# EAGLE board UFBmod_2V1a (EAGLE 7.7.0), part 1 of 2
UFBmod - the best digital modulation ever created :-)
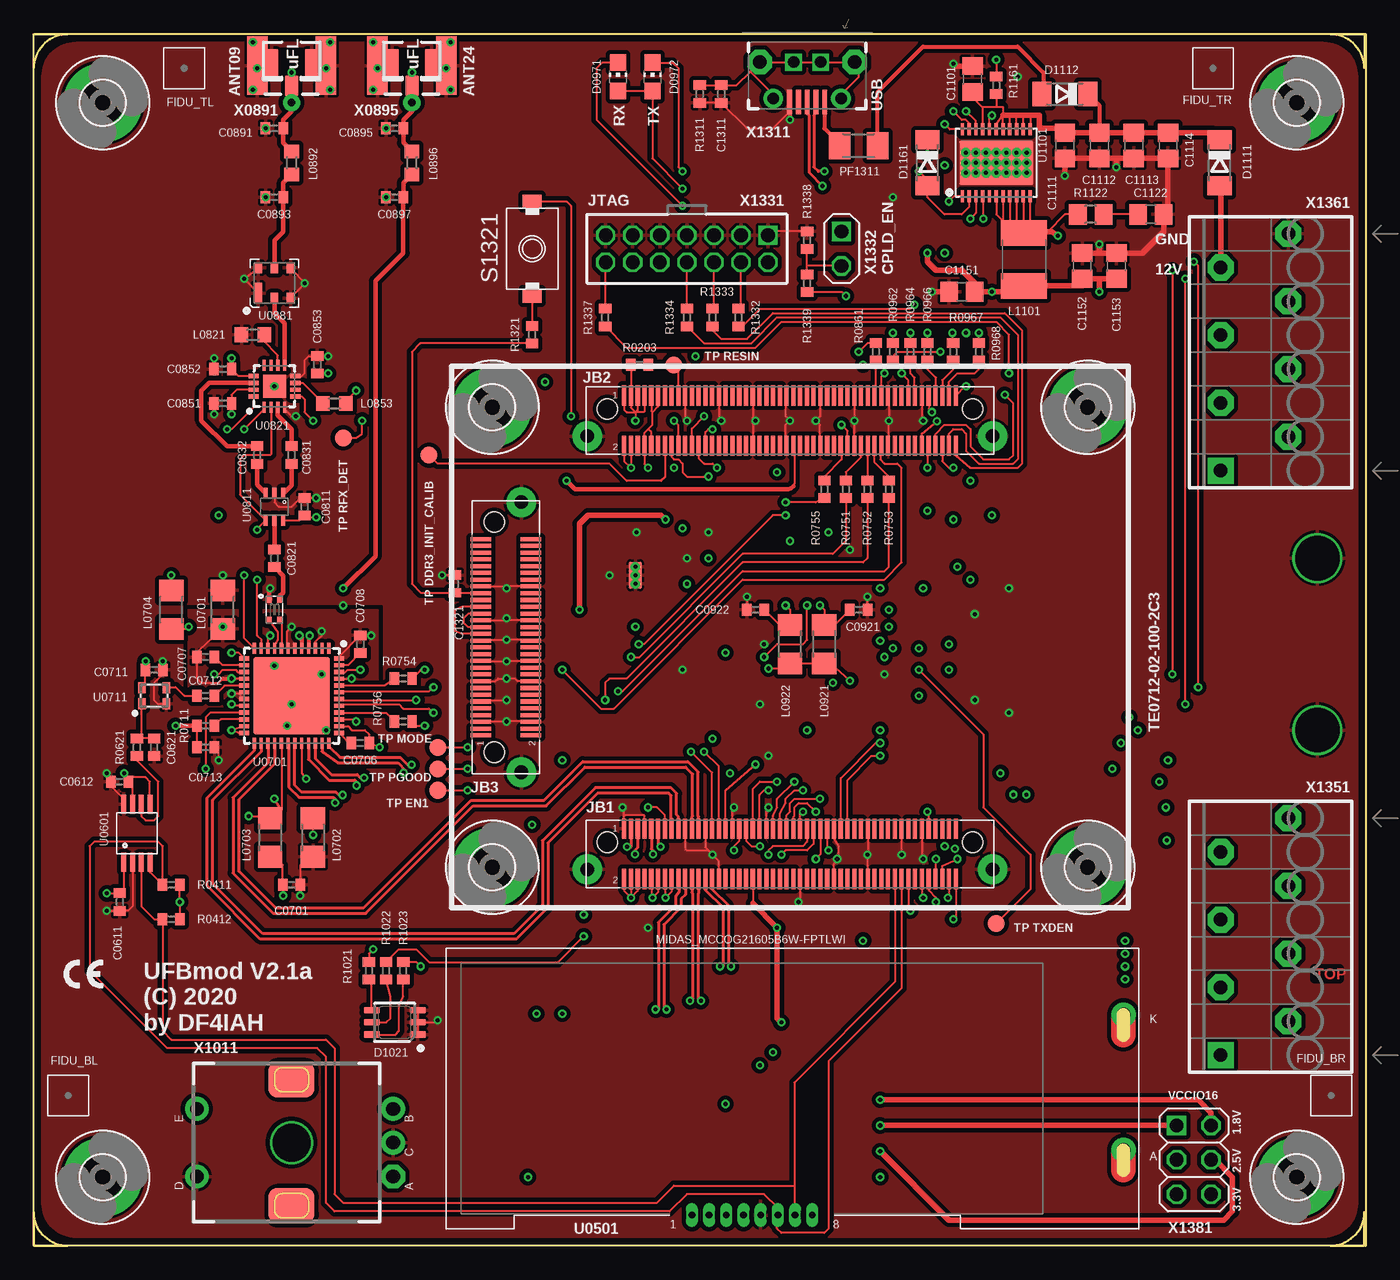
[diagram p0: board, top side]
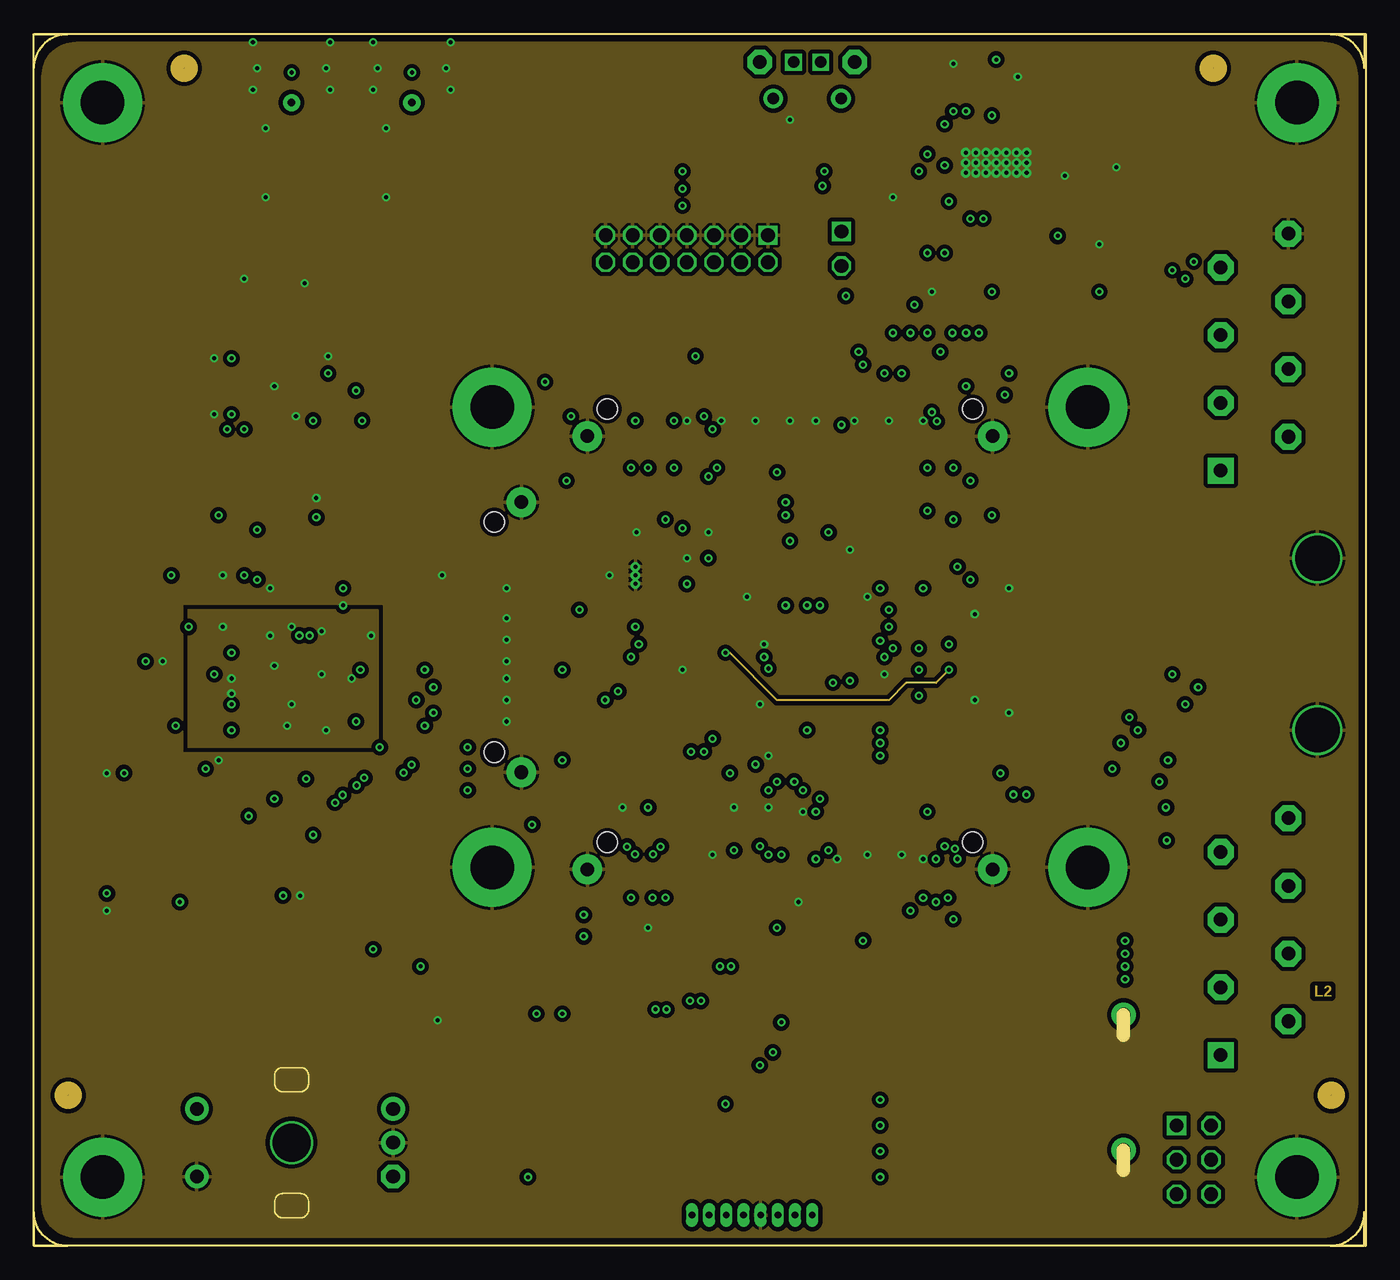
[diagram p1: board, inner layer Route2__GND_Pair_AVSS]
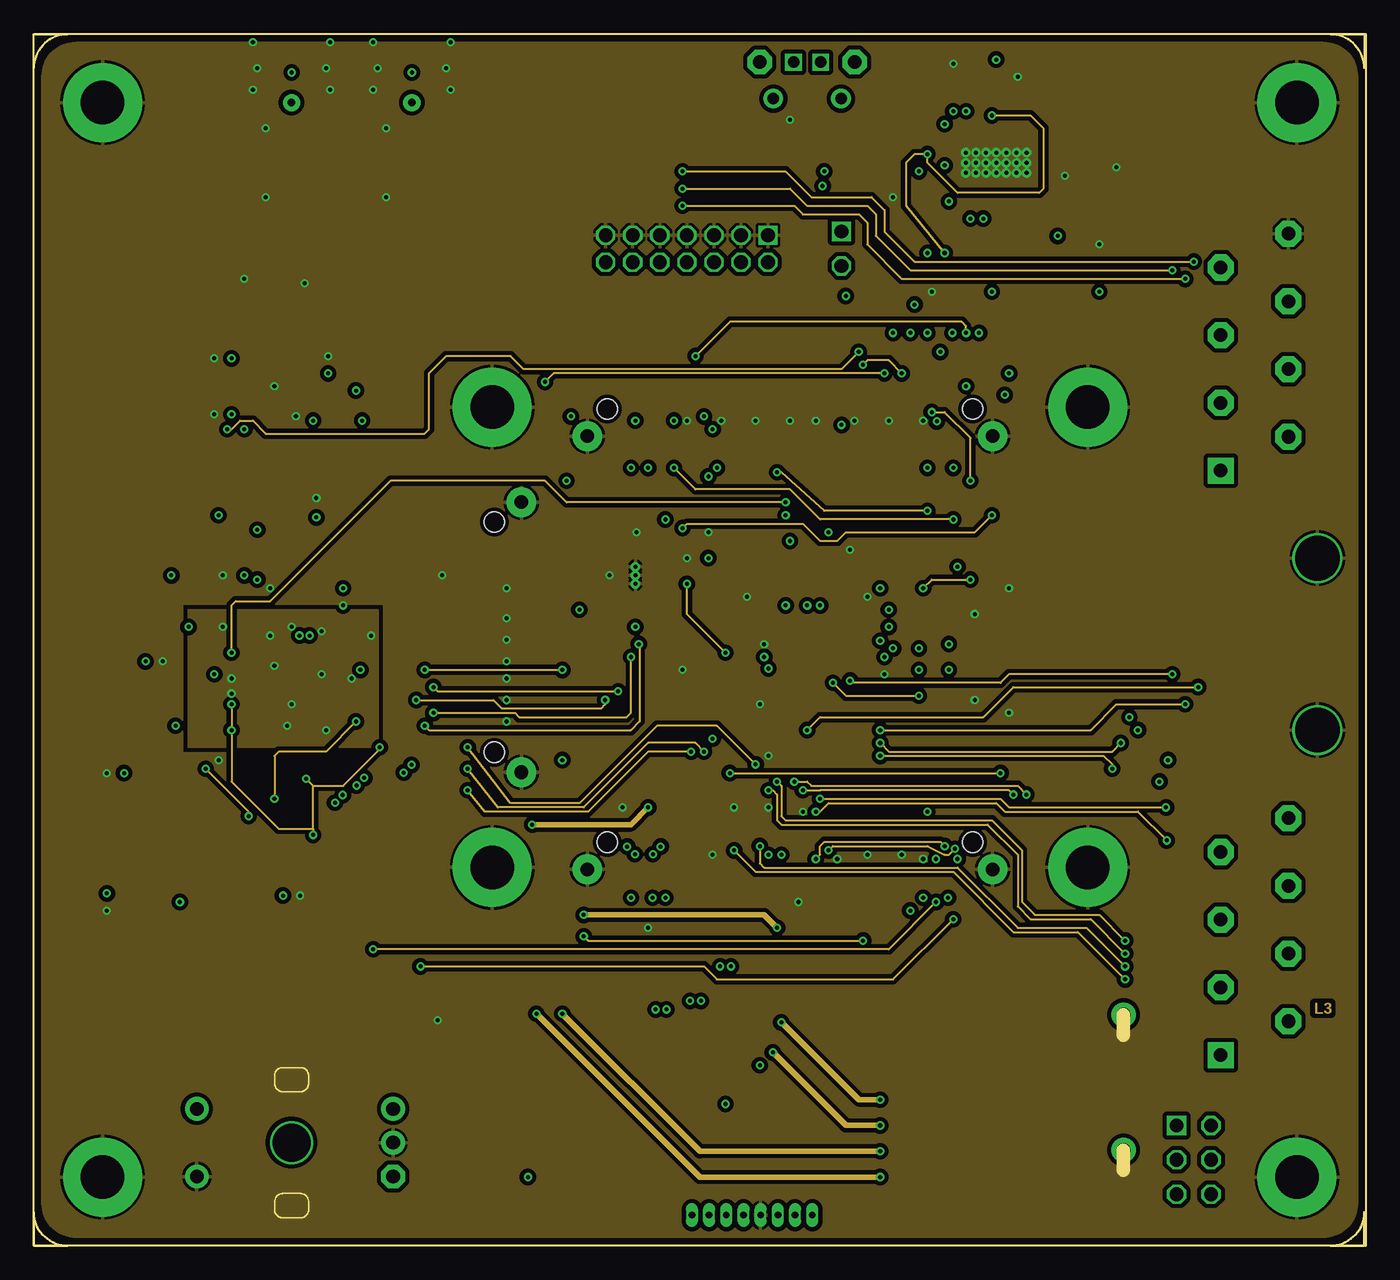
[diagram p2: board, inner layer Route3__SigC_GND]
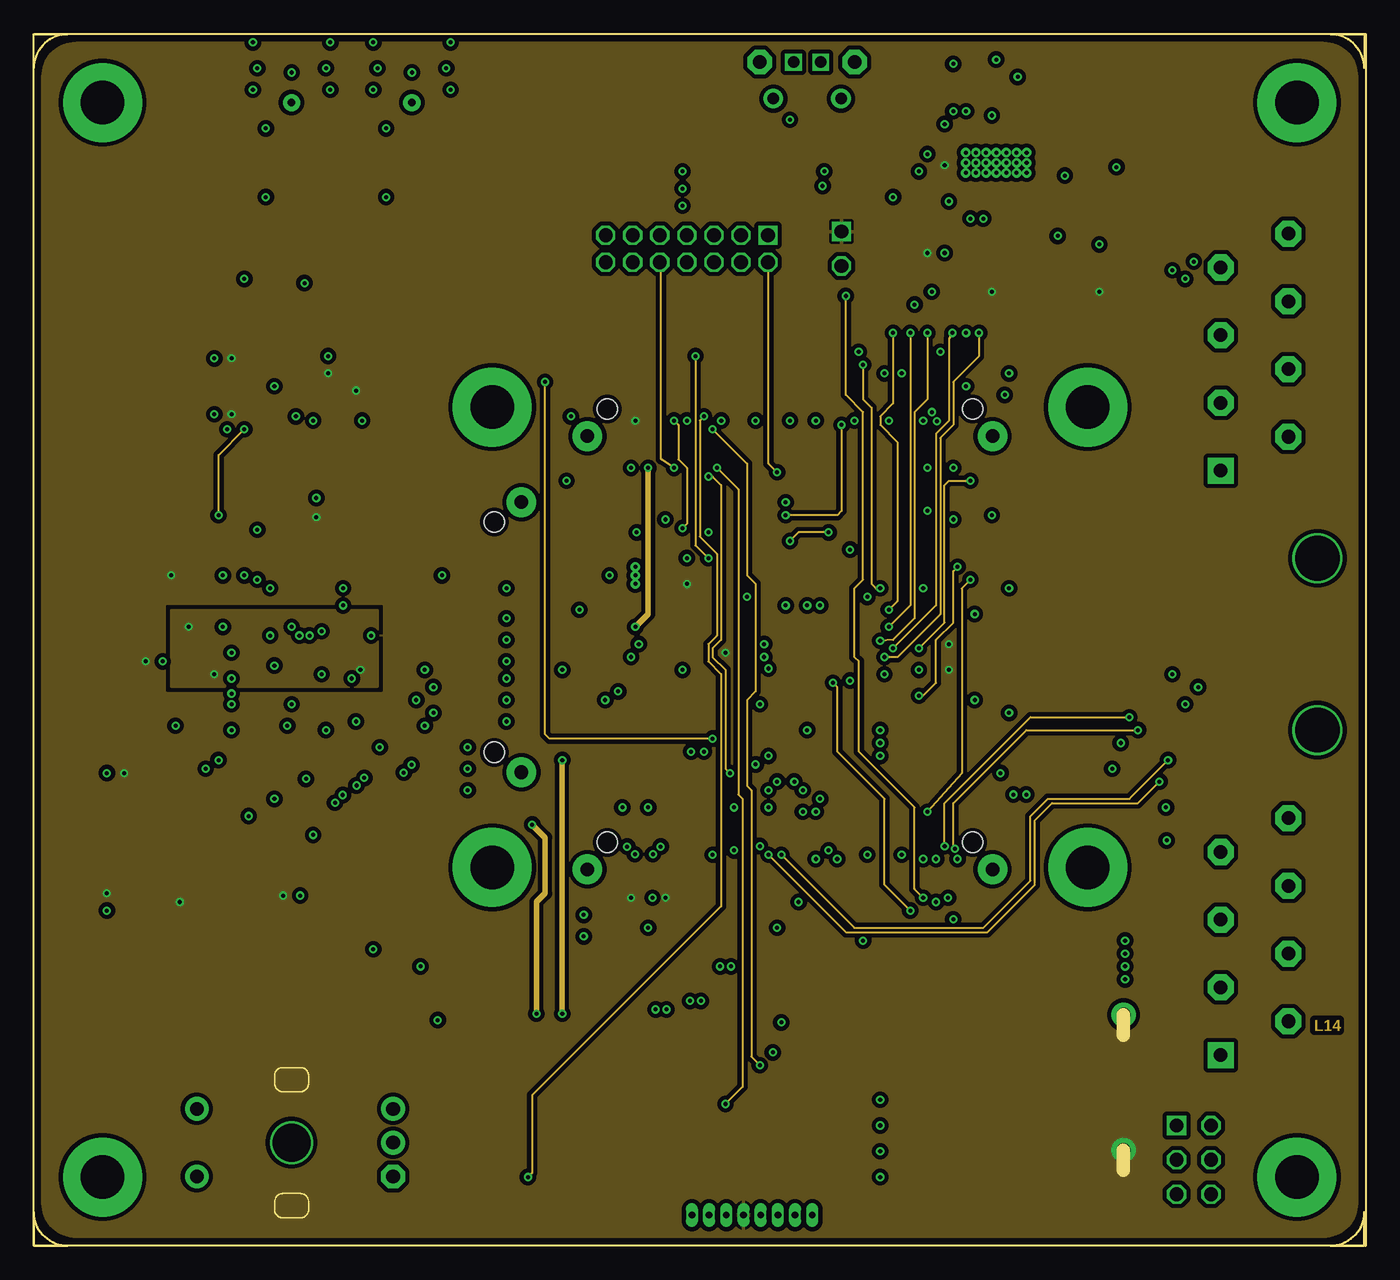
[diagram p3: board, inner layer Route14__VDD_SigD]
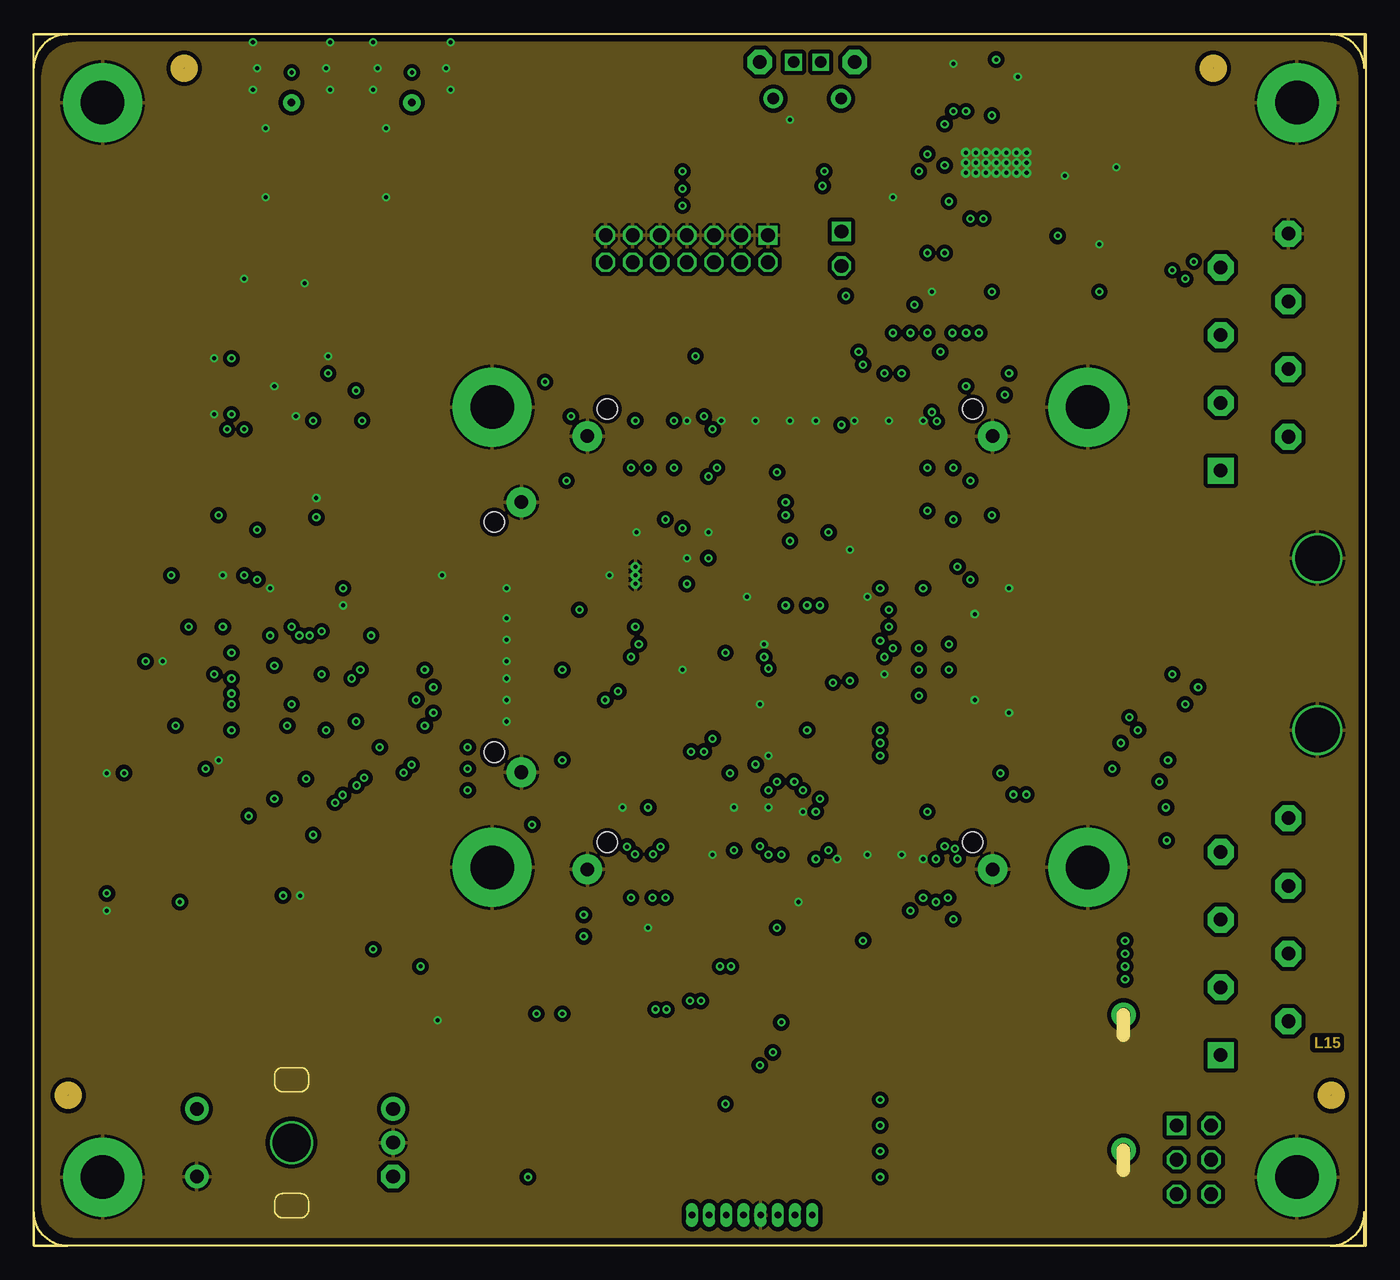
[diagram p4: board, inner layer Route15__GND_Pair]
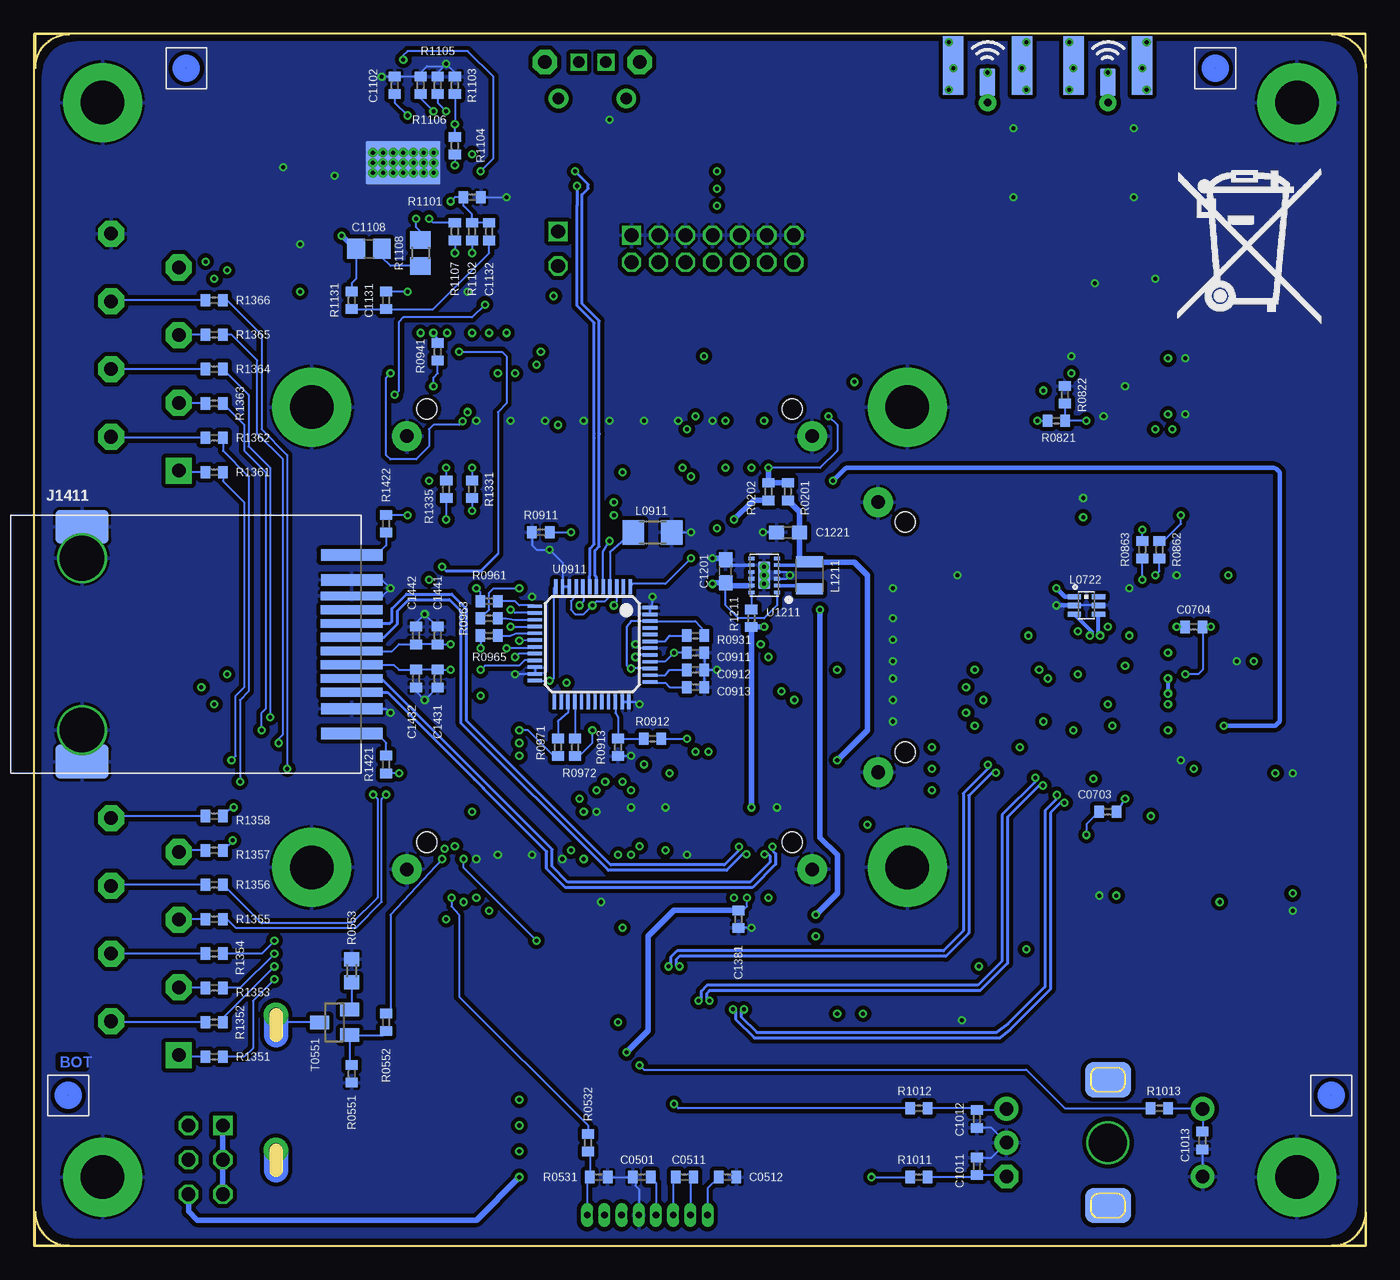
[diagram p5: board, bottom side, seen from below]

Size 98.42 x 89.53 mm. Coordinates in mm from the lower left corner, seen from the top.
Outline: 0,0 0,89.53 98.42,89.53 98.42,0 0,0
Copper layers (1+2+3*14+15+16): Top__SigA_Pair 0.035mm / dielectric 0.2mm / Route2__GND_Pair_AVSS 0.035mm / dielectric 0.36mm / Route3__SigC_GND 0.035mm / dielectric 0.28mm / Route14__VDD_SigD 0.035mm / dielectric 0.36mm / Route15__GND_Pair 0.035mm / dielectric 0.2mm / Bottom__SigB_Pair 0.035mm
Design rules "PCB-POOL Standard_ML6": minimum track width 0.15mm, minimum drill 0.3mm, track to track 0.15mm, track to pad 0.15mm, pad to pad 0.15mm, via to via 0.15mm, smd to smd 0.15mm, copper to edge 0.3mm, drill to drill 0.2mm, minimum pad ring 0.2mm, minimum via ring 0.15mm, stop-mask expansion 0.075mm, vias tented up to drill 0mil, thermal gap 0.2mm
Net classes: 0 default: width 0.127 mm, drill 0.3 mm, clearance 0.127 mm; 1 diff_100R_200u: width 0.203 mm, drill 0.3 mm, clearance 0.203 mm; 2 diff_100R_280u: width 0.229 mm, drill 0.3 mm, clearance 0.152 mm; 3 diff_100R_360u: width 0.267 mm, drill 0.3 mm, clearance 0.152 mm; 4 diff_90R_200u: width 0.216 mm, drill 0.3 mm, clearance 0.152 mm; 5 diff_90R_280u: width 0.292 mm, drill 0.3 mm, clearance 0.152 mm; 6 diff_90R_360u: width 0.318 mm, drill 0.3 mm, clearance 0.127 mm; 7 uni_50R_200u: width 0.343 mm, drill 0.3 mm, clearance 0.381 mm; 8 uni_50R_280u: width 0.483 mm, drill 0.3 mm, clearance 0.381 mm; 9 uni_50R_360u: width 0.635 mm, drill 0.3 mm, clearance 0.381 mm; 10 diff_50R_200u: width 0.508 mm, drill 0.3 mm, clearance 0.127 mm
tRestrict: area 15.9,37.8 to 16.2,43.5; area 15.9,43.5 to 22.2,43.8; area 21.9,37.5 to 22.2,43.5; area 15.9,37.5 to 21.9,37.8
Milling: area 0,87 to 2.5,89.5; area 0,0 to 2.5,2.5; area 95.8,0 to 98.3,2.5; area 95.8,87 to 98.3,89.5

## Footprints (pad centres in the part's own frame; a part is rotated, then mirrored left to right if it is on the bottom)
C0402 = smd 0.7 x 0.9: 1 -0.65,0; 2 0.65,0
C0805 = smd 1.3 x 1.5: 1 -0.95,0; 2 0.95,0
C0603 = smd 1.1 x 1: 1 -0.85,0; 2 0.85,0
CHIP-LED0805 = smd 1.2 x 1.2: A 0,-1.05; C 0,1.05
ASMT-YTB7_0AA02_RGB = smd 1.2 x 0.5: 1 -1.7,0.9; 2 -1.7,0; 3 -1.7,-0.9; 4 1.7,-0.9; 5 1.7,0; 6 1.7,0.9
SOD80C = smd 1.4 x 1.8: A 1.7,0; C -1.7,0
B1,27 = smd 1.27 x 1.27: TP 0,0
3,2-PAD = drill 3.2 pad 5.842: B3,2 0,0
ARJE-0034_RJ45_WITH_MAGNETICS = smd 0.813 x 4.597: 1 6.604,11.43; 2 4.775,11.43; 11 -4.75,11.43; 12 -6.579,11.43 | smd 0.61 x 4.597: 3 3.556,11.43; 4 2.54,11.43; 5 1.524,11.43; 6 0.508,11.43; 7 -0.508,11.43; 8 -1.524,11.43; 9 -2.54,11.43; 10 -3.556,11.43 | smd 2.489 x 3.912: GND@11 -8.674,-8.496; GND@21 8.674,-8.496 | drill 3.3 pad 3.7: GND@12 -6.35,-8.496; GND@22 6.35,-8.496
SAMTEC_LSHM-150-DV = smd 0.3 x 1.5: 1 12.25,-1.85; 2 12.25,1.85; 3 11.75,-1.85; 4 11.75,1.85; 5 11.25,-1.85; 6 11.25,1.85; 7 10.75,-1.85; 8 10.75,1.85; 9 10.25,-1.85; 10 10.25,1.85; 11 9.75,-1.85; 12 9.75,1.85; 13 9.25,-1.85; 14 9.25,1.85; 15 8.75,-1.85; 16 8.75,1.85; 17 8.25,-1.85; 18 8.25,1.85; 19 7.75,-1.85; 20 7.75,1.85; 21 7.25,-1.85; 22 7.25,1.85; 23 6.75,-1.85; 24 6.75,1.85; 25 6.25,-1.85; 26 6.25,1.85; 27 5.75,-1.85; 28 5.75,1.85; 29 5.25,-1.85; 30 5.25,1.85; 31 4.75,-1.85; 32 4.75,1.85; 33 4.25,-1.85; 34 4.25,1.85; 35 3.75,-1.85; 36 3.75,1.85; 37 3.25,-1.85; 38 3.25,1.85; 39 2.75,-1.85; 40 2.75,1.85; 41 2.25,-1.85; 42 2.25,1.85; 43 1.75,-1.85; 44 1.75,1.85; 45 1.25,-1.85; 46 1.25,1.85; 47 0.75,-1.85; 48 0.75,1.85; 49 0.25,-1.85; 50 0.25,1.85; 51 -0.25,-1.85; 52 -0.25,1.85; 53 -0.75,-1.85; 54 -0.75,1.85; 55 -1.25,-1.85; 56 -1.25,1.85; 57 -1.75,-1.85; 58 -1.75,1.85; 59 -2.25,-1.85; 60 -2.25,1.85; 61 -2.75,-1.85; 62 -2.75,1.85; 63 -3.25,-1.85; 64 -3.25,1.85; 65 -3.75,-1.85; 66 -3.75,1.85; 67 -4.25,-1.85; 68 -4.25,1.85; 69 -4.75,-1.85; 70 -4.75,1.85; 71 -5.25,-1.85; 72 -5.25,1.85; 73 -5.75,-1.85; 74 -5.75,1.85; 75 -6.25,-1.85; 76 -6.25,1.85; 77 -6.75,-1.85; 78 -6.75,1.85; 79 -7.25,-1.85; 80 -7.25,1.85; 81 -7.75,-1.85; 82 -7.75,1.85; 83 -8.25,-1.85; 84 -8.25,1.85; 85 -8.75,-1.85; 86 -8.75,1.85; 87 -9.25,-1.85; 88 -9.25,1.85; 89 -9.75,-1.85; 90 -9.75,1.85; 91 -10.25,-1.85; 92 -10.25,1.85; 93 -10.75,-1.85; 94 -10.75,1.85; 95 -11.25,-1.85; 96 -11.25,1.85; 97 -11.75,-1.85; 98 -11.75,1.85; 99 -12.25,-1.85; 100 -12.25,1.85 | drill 1 pad 2.2: F1 14.975,1.15; F2 -14.975,1.15 | hole 1.5: 13.5,-0.85; -13.5,-0.85
SAMTEC_LSHM-130-DV = smd 0.3 x 1.5: 1 7.25,-1.85; 2 7.25,1.85; 3 6.75,-1.85; 4 6.75,1.85; 5 6.25,-1.85; 6 6.25,1.85; 7 5.75,-1.85; 8 5.75,1.85; 9 5.25,-1.85; 10 5.25,1.85; 11 4.75,-1.85; 12 4.75,1.85; 13 4.25,-1.85; 14 4.25,1.85; 15 3.75,-1.85; 16 3.75,1.85; 17 3.25,-1.85; 18 3.25,1.85; 19 2.75,-1.85; 20 2.75,1.85; 21 2.25,-1.85; 22 2.25,1.85; 23 1.75,-1.85; 24 1.75,1.85; 25 1.25,-1.85; 26 1.25,1.85; 27 0.75,-1.85; 28 0.75,1.85; 29 0.25,-1.85; 30 0.25,1.85; 31 -0.25,-1.85; 32 -0.25,1.85; 33 -0.75,-1.85; 34 -0.75,1.85; 35 -1.25,-1.85; 36 -1.25,1.85; 37 -1.75,-1.85; 38 -1.75,1.85; 39 -2.25,-1.85; 40 -2.25,1.85; 41 -2.75,-1.85; 42 -2.75,1.85; 43 -3.25,-1.85; 44 -3.25,1.85; 45 -3.75,-1.85; 46 -3.75,1.85; 47 -4.25,-1.85; 48 -4.25,1.85; 49 -4.75,-1.85; 50 -4.75,1.85; 51 -5.25,-1.85; 52 -5.25,1.85; 53 -5.75,-1.85; 54 -5.75,1.85; 55 -6.25,-1.85; 56 -6.25,1.85; 57 -6.75,-1.85; 58 -6.75,1.85; 59 -7.25,-1.85; 60 -7.25,1.85 | drill 1 pad 2.2: F1 9.975,1.15; F2 -9.975,1.15 | hole 1.5: 8.5,-0.85; -8.5,-0.85
R1206 = smd 1.6 x 1.803: 1 -1.422,0; 2 1.422,0
DXW21HN5011BL = smd 0.5 x 0.45: 1 -0.775,-0.4; 2 0.775,-0.4; 3 0.775,0.4; 4 -0.775,0.4
2450BL15B050 = smd 0.35 x 1: 1 -0.65,-0.9; 2 0,-0.9; 3 0.65,-0.9; 4 0.65,0.9; 5 0,0.9; 6 -0.65,0.9
L0603 = smd 1 x 1.1: 1 -0.85,0; 2 0.85,0
L1812 = smd 1.9 x 3.4: 1 -1.95,0; 2 1.95,0
L2520 = smd 0.8 x 2: 1 -1,0; 2 1,0
M1206 = smd 1.6 x 2: 1 -1.4,0; 2 1.4,0
R0402 = smd 0.7 x 0.9: 1 -0.65,0; 2 0.65,0
R0603 = smd 1 x 1.1: 1 -0.85,0; 2 0.85,0
R0805 = smd 1.3 x 1.5: 1 -0.95,0; 2 0.95,0
KSR223G_SMD_1POL = smd 1 x 1.4: 1 -3.5,0; 2 3.5,0
SOT23 = smd 1 x 1.4: 1 -0.95,-1.1; 2 0.95,-1.1; 3 0,1.1
MIDAS_MCCOG21605B6W-FPTLWI = drill 0.5 pad 0.7 long: 1 18.155,1; 2 19.425,1; 3 20.695,1; 4 21.965,1; 5 23.235,1; 6 24.505,1; 7 25.775,1; 8 27.045,1 | drill 1 pad 1.8: 11 50.05,15.8; 12 50.05,5.8
µMAX8 = smd 1.35 x 0.4: 1 -2.15,0.975; 2 -2.15,0.325; 3 -2.15,-0.325; 4 -2.15,-0.975; 5 2.15,-0.975; 6 2.15,-0.325; 7 2.15,0.325; 8 2.15,0.975
QFN48_7X7-0P5-PAD = smd 0.8 x 0.3: 1 -3.5,2.75; 2 -3.5,2.25; 3 -3.5,1.75; 4 -3.5,1.25; 5 -3.5,0.75; 6 -3.5,0.25; 7 -3.5,-0.25; 8 -3.5,-0.75; 9 -3.5,-1.25; 10 -3.5,-1.75; 11 -3.5,-2.25; 12 -3.5,-2.75; 25 3.5,-2.75; 26 3.5,-2.25; 27 3.5,-1.75; 28 3.5,-1.25; 29 3.5,-0.75; 30 3.5,-0.25; 31 3.5,0.25; 32 3.5,0.75; 33 3.5,1.25; 34 3.5,1.75; 35 3.5,2.25; 36 3.5,2.75 | smd 0.3 x 0.8: 13 -2.75,-3.5; 14 -2.25,-3.5; 15 -1.75,-3.5; 16 -1.25,-3.5; 17 -0.75,-3.5; 18 -0.25,-3.5; 19 0.25,-3.5; 20 0.75,-3.5; 21 1.25,-3.5; 22 1.75,-3.5; 23 2.25,-3.5; 24 2.75,-3.5; 37 2.75,3.5; 38 2.25,3.5; 39 1.75,3.5; 40 1.25,3.5; 41 0.75,3.5; 42 0.25,3.5; 43 -0.25,3.5; 44 -0.75,3.5; 45 -1.25,3.5; 46 -1.75,3.5; 47 -2.25,3.5; 48 -2.75,3.5 | smd 5.65 x 5.65: 49 0,0
ASVTX-13 = smd 0.6 x 0.8: 1 -0.9,-0.6; 2 0.9,-0.6; 3 0.9,0.6; 4 -0.9,0.6
SC-70_6-LEAD_2X1MM25_0P65 = smd 0.4 x 0.8: 1 -0.65,-1; 2 0,-1; 3 0.65,-1; 4 0.65,1; 5 0,1; 6 -0.65,1
QFN16-3X3-0P5-PAD = smd 0.8 x 0.3: 1 -1.55,0.75; 2 -1.55,0.25; 3 -1.55,-0.25; 4 -1.55,-0.75; 9 1.55,-0.75; 10 1.55,-0.25; 11 1.55,0.25; 12 1.55,0.75 | smd 0.3 x 0.8: 5 -0.75,-1.55; 6 -0.25,-1.55; 7 0.25,-1.55; 8 0.75,-1.55; 13 0.75,1.55; 14 0.25,1.55; 15 -0.25,1.55; 16 -0.75,1.55 | smd 1.7 x 1.7: 17 0,0
B3440_3MM-X-3MM = smd 0.65 x 1.55: 1 -1.2,-0.75 | smd 0.65 x 0.8: 2 0,-1.125; 3 1.2,-1.125; 4 1.2,1.125; 5 0,1.125; 6 -1.2,1.125
LQFP48 = smd 1.1 x 0.25: 1 -4.25,2.8; 2 -4.25,2.3; 3 -4.25,1.8; 4 -4.25,1.3; 5 -4.25,0.8; 6 -4.25,0.3; 7 -4.25,-0.2; 8 -4.25,-0.7; 9 -4.25,-1.2; 10 -4.25,-1.7; 11 -4.25,-2.2; 12 -4.25,-2.7; 25 4.25,-2.8; 26 4.25,-2.3; 27 4.25,-1.8; 28 4.25,-1.3; 29 4.25,-0.8; 30 4.25,-0.3; 31 4.25,0.2; 32 4.25,0.7; 33 4.25,1.2; 34 4.25,1.7; 35 4.25,2.2; 36 4.25,2.7 | smd 0.25 x 1.1: 13 -2.8,-4.25; 14 -2.3,-4.25; 15 -1.8,-4.25; 16 -1.3,-4.25; 17 -0.8,-4.25; 18 -0.3,-4.25; 19 0.2,-4.25; 20 0.7,-4.25; 21 1.2,-4.25; 22 1.7,-4.25; 23 2.2,-4.25; 24 2.7,-4.25; 37 2.8,4.25; 38 2.3,4.25; 39 1.8,4.25; 40 1.3,4.25; 41 0.8,4.25; 42 0.3,4.25; 43 -0.2,4.25; 44 -0.7,4.25; 45 -1.2,4.25; 46 -1.7,4.25; 47 -2.2,4.25; 48 -2.7,4.25
DQP-22 = smd 0.28 x 0.85: 1 -2.5,-2.475; 2 -2,-2.475; 3 -1.5,-2.475; 4 -1,-2.475; 5 -0.5,-2.475; 6 0,-2.475; 7 0.5,-2.475; 8 1,-2.475; 9 1.5,-2.475; 10 2,-2.475; 11 2.5,-2.475; 12 2.5,2.475; 13 2,2.475; 14 1.5,2.475; 15 1,2.475; 16 0.5,2.475; 17 0,2.475; 18 -0.5,2.475; 19 -1,2.475; 20 -1.5,2.475; 21 -2,2.475; 22 -2.5,2.475 | smd 5.48 x 3.24: 23 0,0 | smd 5.48 x 3.24 bottom: 24 0,0 | drill 0.3 pad 0.61: P$1 -2.25,-0.75; P$2 -1.5,-0.75; P$3 -0.75,-0.75; P$4 0,-0.75; P$5 0.75,-0.75; P$6 1.5,-0.75; P$7 2.25,-0.75; P$8 -2.25,0; P$9 -1.5,0; P$10 -0.75,0; P$11 0,0; P$12 0.75,0; P$13 1.5,0; P$14 2.25,0; P$15 -2.25,0.75; P$16 -1.5,0.75; P$17 -0.75,0.75; P$18 0,0.75; P$19 0.75,0.75; P$20 1.5,0.75; P$21 2.25,0.75
WSON-12 = smd 0.5 x 0.25: 1 -0.95,1.25; 2 -0.95,0.75; 3 -0.95,0.25; 4 -0.95,-0.25; 5 -0.95,-0.75; 6 -0.95,-1.25; 7 0.95,-1.25; 8 0.95,-0.75; 9 0.95,-0.25; 10 0.95,0.25; 11 0.95,0.75; 12 0.95,1.25 | smd 0.9 x 2: 13 0,0 | smd 0.9 x 2 bottom: 14 0,0 | drill 0.3 pad 0.6: G1 0,0; G2 0,0.635; G3 0,-0.635
SMA_UFL_PAD_TINY = smd 1.524 x 1.016: ANT1 -3.843,0 | drill 0.559 pad 1.27: ANT2 -5.08,0 | smd 2.032 x 1.143 bottom: ANT3 -3.589,0 | smd 2.2 x 1.016: GND1 -2.223,1.47; GND2 -2.223,-1.47 | smd 4.318 x 1.524: GND3 -2.349,-2.54; GND4 -2.349,2.54 | smd 4.318 x 1.524 bottom: GND5 -2.349,2.54; GND6 -2.349,-2.54
TTE_EN11-HSM = drill 1 pad 1.75 octagon: A -2.5,-7.5 | drill 1 pad 1.75: B 2.5,-7.5; C 0,-7.5; D -2.5,7; E 2.5,7 | smd 2.6 x 3.4: GND11 -4.65,0; GND12 4.65,0 | smd 2.6 x 3.4 bottom: GND21 -4.65,0; GND22 4.65,0 | drill 2.8 pad 2.8: P$1 0,0
USB-B-MICRO-SMD_MOLEX-105017-0001 = smd 0.35 x 1.8: D+ 0,4.4; D- -0.65,4.4; GND 1.3,4.4; ID 0.65,4.4; VBUS -1.3,4.4 | drill 0.85 pad 1.45: JSHIELD -2.5,4.15; JSHIELD@2 2.5,4.15 | drill 1 pad 1.8 octagon: JSHIELD@3 -3.5,1.45; JSHIELD@6 3.5,1.45 | drill 0.85 square: JSHIELD@4 -1,1.45; JSHIELD@5 1,1.45
2X07_2MM00_SHROUDED_XILINX_JTAG = drill 1.016 square: 1 -6,-1 | drill 1.016 octagon: 2 -6,1; 3 -4,-1; 4 -4,1; 5 -2,-1; 6 -2,1; 7 0,-1; 8 0,1; 9 2,-1; 10 2,1; 11 4,-1; 12 4,1; 13 6,-1; 14 6,1
1X02 = drill 1.016 square: 1 0,0 | drill 1.016 octagon: 2 0,2.54
PHOENIX_1990067_1X8X2MM50_PTSA-0-5 = drill 1 pad 1.93 square: 1 -7.5,5 | drill 1 pad 1.93 octagon: 2 -5,0; 3 -2.5,5; 4 0,0; 5 2.5,5; 6 5,0; 7 7.5,5; 8 10,0
2X03 = drill 1.016 square: 1 -2.54,-1.27 | drill 1.016 octagon: 2 -2.54,1.27; 3 0,-1.27; 4 0,1.27; 5 2.54,-1.27; 6 2.54,1.27

## Placement (x,y rotation side)
C0501  100nF  [C0402]  53.5,5.08 180 bottom
C0511  1uF  [C0402]  50.32,5.08 0 bottom
C0512  1uF  [C0402]  47.15,5.08 0 bottom
C0611  100nF  [C0402]  6.35,25.4 270 top
C0612  100nF  [C0402]  6.35,34.29 180 top
C0621  1uF  [C0402]  8.89,36.83 270 top
C0701  1uF  [C0402]  19.05,26.67 0 top
C0703  1nF  [C0402]  19.05,32.07 180 bottom
C0704  1nF  [C0402]  12.7,45.72 180 bottom
C0706  100nF  [C0402]  24.13,37.15 180 top
C0707  100nF  [C0402]  12.7,43.5 0 top
C0708  100nF  [C0402]  24.13,44.45 270 top
C0711  10nF  [C0402]  8.89,42.55 0 top
C0712  10nF  [C0402]  12.7,40.64 0 top
C0713  1nF  [C0402]  12.7,36.83 180 top
C0811  100nF  [C0402]  20,54.61 90 top
C0821  1nF  [C0402]  17.78,50.8 270 top
C0831  1nF  [C0402]  19.05,58.42 270 top
C0832  1nF  [C0402]  16.51,58.42 270 top
C0851  10nF  [C0402]  13.97,62.23 180 top
C0852  10nF  [C0402]  13.97,64.77 180 top
C0853  10nF  [C0402]  20.95,65.09 90 top
C0891  0pF  [C0402]  17.78,82.55 180 top
C0893  0pF  [C0402]  17.78,77.47 180 top
C0895  0pF  [C0402]  26.67,82.55 180 top
C0897  0pF  [C0402]  26.67,77.47 180 top
C0911  100nF  [C0402]  49.53,43.81 0 bottom
C0912  100nF  [C0402]  49.53,42.55 180 bottom
C0913  100nF  [C0402]  49.53,41.27 180 bottom
C0921  100nF  [C0402]  60.96,46.99 180 top
C0922  100nF  [C0402]  53.34,46.99 0 top
C1011  100nF  [C0402]  28.73,5.87 90 bottom
C1012  100nF  [C0402]  28.73,9.37 270 bottom
C1013  100nF  [C0402]  12.06,7.78 270 bottom
C1101  4.7uF  [C0805]  69.37,86.2 270 top
C1102  1uF  [C0402]  71.75,85.72 270 bottom
C1108  100nF  [C0805]  73.66,73.66 0 bottom
C1111  22uF  [C0805]  76.2,81.28 90 top
C1112  22uF  [C0805]  78.74,81.28 90 top
C1113  22uF  [C0805]  81.28,81.28 90 top
C1114  22uF  [C0805]  83.82,81.28 90 top
C1122  N/A  [C0805]  82.55,76.2 0 top
C1131  100nF  [C0402]  72.39,69.85 270 bottom
C1132  1nF  [C0402]  64.77,74.93 90 bottom
C1151  100uF  [C0805]  68.58,70.48 180 top
C1152  100uF  [C0805]  77.47,72.39 90 top
C1153  100uF  [C0805]  80.01,72.39 90 top
C1201  10uF  [C0603]  47.31,49.85 90 bottom
C1221  10uF  [C0603]  42.7,52.7 180 bottom
C1311  1nF  [C0402]  50.8,85.09 90 top
C1321  100nF  [C0402]  31.11,48.9 270 top
C1381  100nF  [C0402]  46.35,24.13 90 bottom
C1431  1uF  [C0402]  68.58,41.91 270 bottom
C1432  100nF  [C0402]  70.17,41.91 270 bottom
C1441  1uF  [C0402]  68.58,45.09 90 bottom
C1442  100nF  [C0402]  70.17,45.09 90 bottom
D0971  CMD17-21VGD/TR8 GREEN  [CHIP-LED0805]  43.18,86.36 0 top
D0972  CMD17-21VRD/TR8 RED  [CHIP-LED0805]  45.72,86.36 0 top
D1021  ASMT-YTB7-0AA02_RGB  [ASMT-YTB7_0AA02_RGB]  26.67,16.51 180 top
D1111  CRS08  [SOD80C]  87.63,80.01 270 top
D1112  CRS08  [SOD80C]  76.2,85.09 180 top
D1161  CRS08  [SOD80C]  66.04,80.01 270 top
FIDU_BL  [FIDUCIAL_MARK_1MM]  2.54,11.11 0 top
FIDU_BR  [FIDUCIAL_MARK_1MM]  95.89,11.11 0 top
FIDU_TL  [FIDUCIAL_MARK_1MM]  11.11,87 0 top
FIDU_TR  [FIDUCIAL_MARK_1MM]  87.15,87 0 top
FPGA_EN1  TPB1,27  [B1,27]  29.84,33.66 0 top
FPGA_MODE  TPB1,27  [B1,27]  29.84,36.83 0 top
H1511  MOUNT-PAD-ROUND3.2  [3,2-PAD]  5.08,84.45 0 top
H1512  MOUNT-PAD-ROUND3.2  [3,2-PAD]  5.08,5.08 0 top
H1513  MOUNT-PAD-ROUND3.2  [3,2-PAD]  93.34,84.45 0 top
H1514  MOUNT-PAD-ROUND3.2  [3,2-PAD]  93.34,5.08 0 top
HB_351  MOUNT-PAD-ROUND3.2  [3,2-PAD]  77.88,27.96 180 top
HB_352  MOUNT-PAD-ROUND3.2  [3,2-PAD]  77.88,61.96 180 top
HB_353  MOUNT-PAD-ROUND3.2  [3,2-PAD]  33.88,27.96 180 top
HB_354  MOUNT-PAD-ROUND3.2  [3,2-PAD]  33.88,61.96 180 top
J1411  ABRACON_ARJE-0034  [ARJE-0034_RJ45_WITH_MAGNETICS]  86.36,44.45 270 bottom
JB1  LSHM-150-04.0-L-DV-A-S-K-TR  [SAMTEC_LSHM-150-DV]  55.88,28.96 180 top
JB2  LSHM-150-04.0-L-DV-A-S-K-TR  [SAMTEC_LSHM-150-DV]  55.88,60.96 180 top
JB3  LSHM-130-04.0-L-DV-A-S-K-TR  [SAMTEC_LSHM-130-DV]  34.88,44.96 270 top
L0701  300R  [R1206]  13.97,46.99 270 top
L0702  300R  [R1206]  20.64,30.16 90 top
L0703  300R  [R1206]  17.46,30.16 90 top
L0704  300R  [R1206]  10.16,46.99 270 top
L0721  MURATA DXW21HN5011BL  [DXW21HN5011BL]  17.78,46.99 270 top
L0722  Johanson 2450BL15B050E  [2450BL15B050]  20.64,47.31 270 bottom
L0821  2.7nH  [L0603]  16.19,67.31 180 top
L0853  6.8nH  [L0603]  22.23,62.23 180 top
L0892  0nH  [L0603]  19.05,80.01 90 top
L0896  0nH  [L0603]  27.94,80.01 90 top
L0911  300R  [R1206]  52.7,52.7 180 bottom
L0921  300R  [R1206]  58.42,44.45 270 top
L0922  300R  [R1206]  55.88,44.45 270 top
L1101  440nH  [L1812]  73.18,72.87 90 top
L1211  4.7uH  [L2520]  41.12,49.53 270 bottom
PF1311  1.1A/2.2A  [M1206]  60.96,81.28 180 top
PGOOD  TPB1,27  [B1,27]  29.84,35.24 0 top
R0201  0R  [R0402]  42.7,55.72 90 bottom
R0202  N/A  [R0402]  44.13,55.72 90 bottom
R0203  10kR  [R0402]  44.77,65.09 180 top
R0411  3.9kR  [R0402]  10.16,26.67 0 top
R0412  3.9kR  [R0402]  10.16,24.13 0 top
R0531  220kR  [R0402]  56.67,5.08 180 bottom
R0532  1kR  [R0402]  57.47,7.62 270 bottom
R0551  1.5kR  [R0402]  74.93,12.7 90 bottom
R0552  2.0kR  [R0402]  72.39,16.51 90 bottom
R0553  27R  [R0603]  74.93,20.32 270 bottom
R0621  100kR  [R0402]  7.62,36.83 90 top
R0711  33R  [R0402]  12.7,38.42 0 top
R0751  100R  [R0402]  60.01,55.88 90 top
R0752  100R  [R0402]  61.59,55.88 90 top
R0753  100R  [R0402]  63.18,55.88 90 top
R0754  100R  [R0402]  27.3,41.91 0 top
R0755  100R  [R0402]  58.42,55.88 90 top
R0756  100R  [R0402]  27.3,38.73 0 top
R0821  100R  [R0402]  22.86,60.96 180 bottom
R0822  10kR  [R0402]  22.23,62.87 270 bottom
R0861  10kR  [R0402]  62.23,66.04 90 top
R0862  10kR  [R0402]  15.24,51.44 90 bottom
R0863  10kR  [R0402]  16.51,51.44 90 bottom
R0911  12kR 1%0  [R0402]  60.96,52.7 0 bottom
R0912  100R  [R0402]  52.7,37.47 180 bottom
R0913  100kR  [R0402]  55.24,36.83 90 bottom
R0931  10kR  [R0402]  49.53,45.09 0 bottom
R0941  100R  [R0402]  68.58,66.04 90 bottom
R0961  100R  [R0402]  64.77,47.62 180 bottom
R0962  100R  [R0402]  63.5,66.04 270 top
R0963  100R  [R0402]  64.77,46.35 180 bottom
R0964  100R  [R0402]  64.77,66.04 270 top
R0965  100R  [R0402]  64.77,45.09 180 bottom
R0966  100R  [R0402]  66.04,66.04 270 top
R0967  100R  [R0402]  67.94,66.04 270 top
R0968  100R  [R0402]  69.85,66.04 270 top
R0971  560R  [R0402]  59.69,36.83 270 bottom
R0972  560R  [R0402]  58.42,36.83 270 bottom
R1011  1kR  [R0402]  33.02,5.08 180 bottom
R1012  1kR  [R0402]  33.02,10.16 180 bottom
R1013  1kR  [R0402]  15.24,10.16 180 bottom
R1021  820R  [R0402]  24.77,20.32 90 top
R1022  1kR  [R0402]  26.04,20.32 90 top
R1023  820R  [R0402]  27.3,20.32 90 top
R1101  10kR 0%5  [R0402]  66.04,77.47 180 bottom
R1102  45.3kR 0%5  [R0402]  66.04,74.93 270 bottom
R1103  187kR  [R0402]  67.31,85.72 270 bottom
R1104  N/A  [R0402]  67.31,81.28 90 bottom
R1105  110kR  [R0402]  68.58,85.72 270 bottom
R1106  200kR  [R0402]  69.85,85.72 270 bottom
R1107  100kR  [R0402]  67.31,74.93 270 bottom
R1108  2R  [R0805]  69.85,73.34 270 bottom
R1122  N/A  [R0805]  78.11,76.2 180 top
R1131  3.01kR  [R0402]  74.93,69.85 270 bottom
R1161  220kR  [R0402]  71.12,85.72 270 top
R1211  10kR  [R0402]  45.4,46.35 90 bottom
R1311  330kR  [R0402]  49.21,85.09 90 top
R1321  1kR  [R0402]  36.83,67.31 90 top
R1331  1kR  [R0402]  66.04,55.88 90 bottom
R1332  100R  [R0402]  52.07,68.58 270 top
R1333  100R  [R0402]  50.16,68.58 270 top
R1334  100R  [R0402]  48.26,68.58 270 top
R1335  100R  [R0402]  67.94,55.88 90 bottom
R1337  100R  [R0402]  42.23,68.58 270 top
R1338  10kR  [R0402]  57.15,74.3 90 top
R1339  100R  [R0402]  57.15,71.12 270 top
R1351  100R  [R0402]  85.09,13.97 180 bottom
R1352  100R  [R0402]  85.09,16.51 180 bottom
R1353  100R  [R0402]  85.09,19.05 180 bottom
R1354  100R  [R0402]  85.09,21.59 180 bottom
R1355  100R  [R0402]  85.09,24.13 180 bottom
R1356  100R  [R0402]  85.09,26.67 180 bottom
R1357  100R  [R0402]  85.09,29.21 180 bottom
R1358  100R  [R0402]  85.09,31.75 180 bottom
R1361  100R  [R0402]  85.09,57.15 180 bottom
R1362  100R  [R0402]  85.09,59.69 180 bottom
R1363  100R  [R0402]  85.09,62.23 180 bottom
R1364  100R  [R0402]  85.09,64.77 180 bottom
R1365  100R  [R0402]  85.09,67.31 180 bottom
R1366  100R  [R0402]  85.09,69.85 180 bottom
R1421  1kR  [R0402]  72.39,35.56 90 bottom
R1422  1kR  [R0402]  72.39,53.34 270 bottom
S1321  KSR223G_SMD_1POL  [KSR223G_SMD_1POL]  36.83,73.66 90 top
T0551  MMBT2222  [SOT23]  76.2,16.51 90 bottom
TP1371  TPB1,27  [B1,27]  29.21,58.42 0 top
TP_RESIN  TPB1,27  [B1,27]  47.31,65.09 0 top
TP_RFX_DET  TPB1,27  [B1,27]  22.86,59.69 0 top
TP_TXDEN  TPB1,27  [B1,27]  71.12,23.81 0 top
U0501  MIDAS_MCCOG21605B6W-FPTLWI  [MIDAS_MCCOG21605B6W-FPTLWI]  30.48,1.27 0 top
U0601  MAX5217  [µMAX8]  7.62,30.48 90 top
U0701  AT86RF215-ZU  [QFN48_7X7-0P5-PAD]  19.05,40.64 270 top
U0711  ASVTX-13-D-26.000MHZ-I05-T  [ASVTX-13]  8.89,40.64 0 top
U0811  PE4259  [SC-70_6-LEAD_2X1MM25_0P65]  17.78,54.61 180 top
U0821  RFX1010  [QFN16-3X3-0P5-PAD]  17.78,63.5 90 top
U0881  B39871B3440U410  [B3440_3MM-X-3MM]  17.78,71.12 0 top
U0911  FT232HL  [LQFP48]  57.15,44.45 270 bottom
U1101  TPS53353  [DQP-22]  71.12,80.01 0 top
U1211  TPS62745DSSR  [WSON-12]  44.45,49.53 180 bottom
X0891  ANTENNATINY  [SMA_UFL_PAD_TINY]  19.05,89.53 90 top
X0895  ANTENNATINY  [SMA_UFL_PAD_TINY]  27.94,89.53 90 top
X1011  TTE_EN11-HSM  [TTE_EN11-HSM]  19.05,7.62 90 top
X1311  MOLEX 105017-0001  [USB-B-MICRO-SMD_MOLEX-105017-0001]  57.15,88.9 180 top
X1331  [2X07_2MM00_SHROUDED_XILINX_JTAG]  48.26,73.66 180 top
X1332  [1X02]  59.69,74.93 180 top
X1351  PHOENIX_1990067_1X8X2MM50_PTSA-0-5  [PHOENIX_1990067_1X8X2MM50_PTSA-0-5]  92.71,21.59 90 top
X1361  PHOENIX_1990067_1X8X2MM50_PTSA-0-5  [PHOENIX_1990067_1X8X2MM50_PTSA-0-5]  92.71,64.77 90 top
X1381  [2X03]  85.72,6.35 270 top

## Library data of the parts
C0501 C0511 C0512 C0611 C0612 C0621 C0701 C0703 C0704 C0706-C0708 C0711-C0713 C0811 C0821 C0831 C0832 C0851-C0853 C0891 C0893 C0895 C0897 C0911-C0913 C0921 C0922 C1011-C1013 C1101 C1102 C1108 C1111-C1114 C1122 C1131 C1132 C1151-C1153 C1201 C1221 C1311 C1321 C1381 C1431 C1432 C1441 C1442 L0701-L0704 L0821 L0853 L0892 L0896 L0911 L0921 L0922 L1101 L1211 R0201-R0203 R0411 R0412 R0531 R0532 R0551-R0553 R0621 R0711 R0751-R0756 R0821 R0822 R0861-R0863 R0911-R0913 R0931 R0941 R0961-R0968 R0971 R0972 R1011-R1013 R1021-R1023 R1101-R1108 R1122 R1131 R1161 R1211 R1311 R1321 R1331-R1335 R1337-R1339 R1351-R1358 R1361-R1366 R1421 R1422 = df4iah_rcl
D0971 D0972 D1021 = df4iah_led
D1111 D1112 D1161 = df4iah_diode
FIDU_BL FIDU_BR FIDU_TL FIDU_TR = df4iah_fiducial
FPGA_EN1 FPGA_MODE J1411 JB1-JB3 PGOOD TP1371 TP_RESIN TP_RFX_DET TP_TXDEN X1311 X1331 X1332 X1351 X1361 X1381 = df4iah_connector
H1511-H1514 HB_351-HB_354 = df4iah_holes
L0721 L0722 = df4iah_balun
PF1311 = rcl
S1321 X1011 = df4iah_switch
T0551 = transistor
U0501 = df4iah_lcd
U0601 = df4iah_dac
U0701 U0811 U0821 U0881 = df4iah_rf
U0711 = df4iah_osc
U0911 = df4iah_dataconvertion
U1101 U1211 = df4iah_powersupply
X0891 X0895 = _c2h

## Nets
26MHZ_DAC_OUT: R0621.1 U0601.6
+2V5: C1221.1 L1211.1 R0201.1 U1211.5 X1381.4
+3V3: C0501.1 C0611.1 C0612.1 C0701.1 C0711.1 C0811.1 C0851.1 C0852.1 C0853.1 C0911.1 C1131.1 C1151.1 C1152.1 C1153.1 C1201.1 C1431.1 C1432.1 C1441.1 C1442.1 J1411.5 J1411.6 JB1.2 JB1.4 JB1.6 JB1.14 JB1.16 JB2.1 JB2.3 JB2.5 JB2.7 L0703.1 L0704.1 L0853.1 L1101.1 R0203.2 R0411.2 R0412.2 R1102.2 R1104.1 U0501.4 U0501.12 U0601.1 U0601.5 U0601.7 U0711.4 U0811.6 U0821.13 U0821.15 U0911.40 U1211.1 U1211.9 U1211.10 U1211.11 X1332.1
+5V_USB: D1112.A PF1311.1
ANT09 [uni_50R_200u]: C0891.1 L0892.2 X0891.ANT1 X0891.ANT2 X0891.ANT3
ANT09_MATCH [uni_50R_200u]: C0893.1 L0892.1 U0881.5
ANT24 [uni_50R_200u]: C0895.1 L0896.2 X0895.ANT1 X0895.ANT2 X0895.ANT3
B2W_51: R1351.2 X1351.1
B2W_52: R1352.2 X1351.2
B2W_53: R1353.2 X1351.3
B2W_54: R1354.2 X1351.4
B2W_55: R1355.2 X1351.5
B2W_56: R1356.2 X1351.6
B2W_57: R1357.2 X1351.7
B2W_58: R1358.2 X1351.8
B2W_61: R1361.2 X1361.1
B2W_62: R1362.2 X1361.2
B2W_63: R1363.2 X1361.3
B2W_64: R1364.2 X1361.4
B2W_65: R1365.2 X1361.5
B2W_66: R1366.2 X1361.6
BOARD_LCD_RESETN: JB1.98 R0532.1
BOARD_ROTENC_I: JB2.22 R1011.2
BOARD_ROTENC_PUSH: JB2.26 R1013.2
BOARD_ROTENC_Q: JB2.24 R1012.2
BOARD_SCL: JB1.82 R0412.1 U0501.7 U0601.3
BOARD_SDA: JB1.84 R0411.1 U0501.6 U0601.4
CLKIN2_N: JB3.31 JB3.39
CLKIN2_P: JB3.33 JB3.37
DDR3_INIT_CALIB_COMPLETE: JB2.14 TP1371.TP
ETH_DA_G: J1411.12 R1422.2
ETH_DA_Y: J1411.1 R1421.2
FE09_ANT [uni_50R_200u]: U0821.9 U0881.2
FE09_RX [uni_50R_200u]: C0832.1 U0821.14
FE09_TX [uni_50R_200u]: C0831.1 U0821.3
FPGA_B16_L2_N: JB1.79
FPGA_B16_L2_P: JB1.81
FPGA_B16_L5_N: JB1.75
FPGA_B16_L5_P: JB1.77
FPGA_B16_L6_N: JB1.85
FPGA_B16_L6_P: JB1.87
FPGA_B16_L7_N [diff_100R_360u]: JB1.59 R1364.1
FPGA_B16_L7_P [diff_100R_360u]: JB1.61 R1363.1
FPGA_B16_L9_N: JB1.55 R1362.1
FPGA_B16_L9_P [diff_100R_360u]: JB1.57 R1361.1
FPGA_B16_L10_N: JB1.69
FPGA_B16_L10_P: JB1.71
FPGA_B16_L11_N [diff_100R_360u]: JB1.67 R1366.1
FPGA_B16_L11_P [diff_100R_360u]: JB1.65 R1365.1
FPGA_B16_L16_N [diff_100R_360u]: JB1.37 R1352.1
FPGA_B16_L16_P [diff_100R_360u]: JB1.35 R1351.1
FPGA_B16_L17_N [diff_100R_360u]: JB1.45 R1356.1
FPGA_B16_L17_P [diff_100R_360u]: JB1.47 R1355.1
FPGA_B16_L18_N [diff_100R_360u]: JB1.49 R1358.1
FPGA_B16_L18_P [diff_100R_360u]: JB1.51 R1357.1
FPGA_B16_L19_N [diff_100R_360u]: JB1.39 R1354.1
FPGA_B16_L19_P [diff_100R_360u]: JB1.41 R1353.1
FPGA_EN1: FPGA_EN1.TP JB1.27
FPGA_ETH_DA_G: JB2.18 R1422.1
FPGA_ETH_DA_Y: JB2.16 R1421.1
FPGA_ETH_RD_N [diff_100R_200u]: J1411.8 JB1.11
FPGA_ETH_RD_P [diff_100R_200u]: J1411.7 JB1.9
FPGA_ETH_TD_N [diff_100R_200u]: J1411.4 JB1.5
FPGA_ETH_TD_P [diff_100R_200u]: J1411.3 JB1.3
FPGA_FT_12MHZ: JB2.99 R0941.1
FPGA_FT_CTSN: JB2.87 R0964.2
FPGA_FT_DCDN: JB2.95 R0967.2
FPGA_FT_DSRN: JB2.93 R0966.2
FPGA_FT_DTRN: JB2.91 R0965.2
FPGA_FT_RESETN: JB2.77 R0912.1
FPGA_FT_RIN: JB2.97 R0968.2
FPGA_FT_RTSN: JB2.85 R0963.2
FPGA_JTAGEN: JB1.90 R1339.2
FPGA_LCD_BL_PWM: JB1.96 R0552.2
FPGA_LED_RGB_BLUE: JB1.100 R1023.2
FPGA_LED_RGB_GREEN: JB1.94 R1022.2
FPGA_LED_RGB_RED: JB1.92 R1021.2
FPGA_MODE: FPGA_MODE.TP JB1.31
FPGA_RESET: C1321.2 JB3.43 R1321.1
FPGA_RESET_R: R1321.2 S1321.1
FPGA_RFX_DET: R0821.2 TP_RFX_DET.TP
FPGA_RFX_MODE: JB2.75 R0861.1
FPGA_SRST: JB2.90 R1337.2
FPGA_TCK: JB2.100 R1333.2
FPGA_TDI: JB2.96 R1335.2
FPGA_TDO: JB2.98 R1334.2
FPGA_TMS: JB2.94 R1332.2
FPGA_UART0_RXD: JB1.91 R0961.2
FPGA_UART0_TXD: JB1.86 R0962.2
FT_AGND: L0911.2 U0911.4 U0911.9 U0911.41
FT_CTS: R0964.1 U0911.16
FT_DCD: R0967.1 U0911.19
FT_DSR: R0966.1 U0911.18
FT_DTR: R0965.1 U0911.17
FT_EEDATA: R0931.1 U0911.43
FT_OSCI: R0941.2 U0911.1
FT_REF: R0911.2 U0911.5
FT_RESET: R0912.2 R0913.2 U0911.34
FT_RI: R0968.1 U0911.20
FT_RTS: R0963.1 U0911.15
FT_RXD: R0962.1 U0911.14
FT_RXLED: R0971.1 U0911.27
FT_RXLED_D: D0971.C R0971.2
FT_TXD: R0961.1 U0911.13
FT_TXDEN: TP_TXDEN.TP U0911.21
FT_TXLED: R0972.1 U0911.28
FT_TXLED_D: D0972.C R0972.2
FT_VCCA: C0913.2 U0911.37
FT_VCCCORE: C0912.2 U0911.38
FT_VCCD: D0971.A D0972.A L0921.2 L0922.2 R0931.2 U0911.12 U0911.24 U0911.39 U0911.46
FT_VPHY: C0922.2 L0922.1 U0911.3
FT_VPLL: C0921.2 L0921.1 U0911.8
GND: C0501.2 C0512.2 C0611.2 C0612.2 C0621.2 C0701.2 C0711.2 C0713.1 C0811.2 C0851.2 C0852.2 C0853.2 C0891.2 C0893.2 C0895.2 C0897.2 C0911.2 C0912.1 C0913.1 C0921.1 C0922.1 C1011.2 C1012.2 C1013.2 C1101.1 C1102.1 C1111.1 C1112.1 C1113.1 C1114.1 C1122.2 C1151.2 C1152.2 C1153.2 C1201.2 C1221.2 C1311.1 C1321.1 C1381.1 C1431.2 C1432.2 C1441.2 C1442.2 D1021.1 D1021.2 D1021.3 H1511.B3,2 H1512.B3,2 H1513.B3,2 H1514.B3,2 HB_351.B3,2 HB_352.B3,2 HB_353.B3,2 HB_354.B3,2 J1411.2 J1411.10 J1411.11 J1411.GND@11 J1411.GND@12 J1411.GND@21 J1411.GND@22 JB1.1 JB1.7 JB1.19 JB1.25 JB1.30 JB1.33 JB1.43 JB1.53 JB1.54 JB1.63 JB1.64 JB1.73 JB1.74 JB1.83 JB1.89 JB1.F1 JB1.F2 JB2.19 JB2.29 JB2.39 JB2.40 JB2.49 JB2.50 JB2.59 JB2.60 JB2.69 JB2.70 JB2.79 JB2.80 JB2.89 JB2.F1 JB2.F2 JB3.5 JB3.6 JB3.11 JB3.17 JB3.18 JB3.23 JB3.24 JB3.29 JB3.30 JB3.35 JB3.36 JB3.45 JB3.46 JB3.F1 JB3.F2 L0701.1 L0702.1 L0721.1 L0722.2 L0722.5 L0821.2 L0911.1 R0531.1 R0551.1 R0553.1 R0822.1 R0911.1 R0913.1 R1101.1 R1103.1 R1105.1 R1106.1 R1311.1 R1338.2 U0501.5 U0601.2 U0601.8 U0711.2 U0811.2 U0821.4 U0821.8 U0821.17 U0881.1 U0881.3 U0881.4 U0881.6 U0911.10 U0911.11 U0911.22 U0911.23 U0911.35 U0911.36 U0911.42 U0911.47 U0911.48 U1101.23 U1101.24 U1101.P$1 U1101.P$2 U1101.P$3 U1101.P$4 U1101.P$5 U1101.P$6 U1101.P$7 U1101.P$8 U1101.P$9 U1101.P$10 U1101.P$11 U1101.P$12 U1101.P$13 U1101.P$14 U1101.P$15 U1101.P$16 U1101.P$17 U1101.P$18 U1101.P$19 U1101.P$20 U1101.P$21 U1211.3 U1211.4 U1211.8 U1211.13 U1211.14 U1211.G1 U1211.G2 U1211.G3 X0891.GND1 X0891.GND2 X0891.GND3 X0891.GND4 X0895.GND1 X0895.GND2 X0895.GND3 X0895.GND4 X1011.C X1011.D X1311.GND X1331.1 X1331.3 X1331.5 X1331.7 X1331.9 X1331.11 X1331.13 X1361.8
JC_SRST: R1337.1 X1331.14
JC_TCK: R1333.1 X1331.6
JC_TDI: R1335.1 X1331.10
JC_TDO: R1334.1 X1331.8
JC_TMS: R1332.1 X1331.4
JC_VCCO_0: R1331.1 X1331.2
JTAG_CPLD_EN: R1338.1 R1339.1 X1332.2
LCD_BL_B: R0551.2 R0552.1 T0551.1
LCD_BL_K: T0551.3 U0501.11
LCD_CAP1N: C0511.2 U0501.2
LCD_CAP1P: C0511.1 U0501.3
LCD_NRST: R0531.2 R0532.2 U0501.8
LCD_VOUT: C0512.1 U0501.1
LED_B_E: R0553.2 T0551.2
LED_RGB_BLUE: D1021.6 R1023.1
LED_RGB_GREEN: D1021.5 R1022.1
LED_RGB_RED: D1021.4 R1021.1
PE09_RF1 [uni_50R_200u]: C0831.2 U0811.1
PE09_RF2 [uni_50R_200u]: C0832.2 U0811.3
PE09_RFC [uni_50R_200u]: C0821.1 U0811.5
PGOOD: JB1.29 PGOOD.TP
PMIC3V3_SW: L1211.2 U1211.2
RESIN: JB2.17 R0203.1 TP_RESIN.TP
RFX_DET: R0821.1 R0822.2 U0821.5
RFX_IND: L0821.1 U0821.10
RFX_MODE: R0861.2 U0821.16
RFX_RXEN: R0862.2 U0821.1
RFX_TXEN: R0863.2 U0811.4 U0821.2
RFX_VDD3: L0853.2 U0821.7
ROT_I: C1011.1 R1011.1 X1011.A
ROT_P: C1013.1 R1013.1 X1011.E
ROT_Q: C1012.1 R1012.1 X1011.B
TPS2_EN: R1211.2 U1211.12
TPS_COR: C1131.2 C1132.1 R1131.2
TPS_EN: D1161.A R1161.1 U1101.2
TPS_LL: C1108.1 L1101.2 R1122.2 R1131.1 U1101.6 U1101.7 U1101.8 U1101.9 U1101.10 U1101.11
TPS_LL_RC: C1122.1 R1122.1
TPS_MODE: R1106.2 U1101.20
TPS_PGOOD: R1107.1 U1101.3
TPS_RF: R1103.2 R1104.2 U1101.22
TPS_TRIP: R1105.2 U1101.21
TPS_VBST: R1108.1 U1101.4
TPS_VBST_R: C1108.2 R1108.2
TPS_VFB: C1132.2 R1101.2 R1102.1 U1101.1
TPS_VIN: C1101.2 C1111.2 C1112.2 C1113.2 C1114.2 D1111.C D1112.C R1161.2 U1101.12 U1101.13 U1101.14 U1101.15 U1101.16 U1101.17 U1101.19
TPS_VREG: C1102.2 D1161.C R1107.2 U1101.18
TRX_AVDD0: C0707.2 U0701.14
TRX_AVDD1: C0708.2 U0701.47
TRX_AVSS: C0704.2 C0707.1 C0708.1 L0701.2 U0701.3 U0701.6 U0701.7 U0701.10 U0701.16 U0701.18 U0701.19 U0701.45 U0701.48 U0701.49
TRX_CLK_26MHZ: C0713.2 JB2.52 R0711.1
TRX_CLKO_26MHZ_R: R0711.2 U0701.22
TRX_DEVDD: C0703.1 L0703.2 U0701.21 U0701.29 U0701.39
TRX_DVDD: C0706.2 U0701.37
TRX_DVSS: C0703.2 C0706.1 L0702.2 U0701.20 U0701.23 U0701.24 U0701.32 U0701.38
TRX_EVDD: C0704.1 L0704.2 U0701.15 U0701.46
TRX_FEA09: R0863.1 U0701.11
TRX_FEA24: U0701.1
TRX_FEB09: R0862.1 U0701.12
TRX_FEB24: U0701.2
TRX_IRQ: JB2.68 R0756.2
TRX_IRQ_R: R0756.1 U0701.40
TRX_MISO: JB2.78 R0754.2
TRX_MISO_R: R0754.1 U0701.44
TRX_MOSI: JB2.76 R0753.2
TRX_MOSI_R: R0753.1 U0701.43
TRX_RF09 [uni_50R_200u]: C0821.2 L0721.4
TRX_RF09_N [diff_50R_200u]: L0721.2 U0701.9
TRX_RF09_P [diff_50R_200u]: L0721.3 U0701.8
TRX_RF24 [uni_50R_200u]: C0897.1 L0722.1 L0896.1
TRX_RF24_N [diff_50R_200u]: L0722.4 U0701.5
TRX_RF24_P [diff_50R_200u]: L0722.3 U0701.4
TRX_RSTN: JB2.66 R0755.2
TRX_RSTN_R: R0755.1 U0701.13
TRX_RXCLK_N [diff_100R_200u]: JB1.22 U0701.33
TRX_RXCLK_P [diff_100R_200u]: JB1.24 U0701.34
TRX_RXD09_N [diff_100R_200u]: JB1.20 U0701.30
TRX_RXD09_P [diff_100R_200u]: JB1.18 U0701.31
TRX_RXD24_N [diff_100R_200u]: JB1.26 U0701.35
TRX_RXD24_P [diff_100R_200u]: JB1.28 U0701.36
TRX_SCLK: JB2.72 R0751.2
TRX_SCLK_R: R0751.1 U0701.41
TRX_SELN: JB2.74 R0752.2
TRX_SELN_R: R0752.1 U0701.42
TRX_TCXO: C0712.2 U0701.17
TRX_TXCLK_N [diff_100R_200u]: JB1.15 U0701.25
TRX_TXCLK_P [diff_100R_200u]: JB1.17 U0701.26
TRX_TXD_N [diff_100R_200u]: JB1.21 U0701.27
TRX_TXD_P [diff_100R_200u]: JB1.23 U0701.28
TRX_TXD_VOID_N [diff_100R_200u]: JB3.49
TRX_TXD_VOID_P [diff_100R_200u]: JB3.47
U1V5: JB2.20
U1V8: JB1.40 R0202.1 X1381.2
U3V3: JB1.13 JB2.8 JB2.9 JB2.10 JB2.11 R1211.1 X1381.6
U3V3_JTAGREF: JB2.92 R1331.2
USB_D_N [diff_90R_200u]: U0911.6 X1311.D-
USB_D_P [diff_90R_200u]: U0911.7 X1311.D+
USB_ID: X1311.ID
USB_SHIELD: C1311.2 R1311.2 X1311.JSHIELD X1311.JSHIELD@2 X1311.JSHIELD@3 X1311.JSHIELD@4 X1311.JSHIELD@5 X1311.JSHIELD@6
USB_VBUS: PF1311.2 X1311.VBUS
VBAT_IN: JB1.80
VCCIO13: JB2.2 JB2.4 R0201.2 R0202.2 S1321.2
VCCIO16: C1381.2 JB1.10 JB1.12 X1381.1 X1381.3 X1381.5
VCTCXO_OUT: C0712.1 U0711.3
VCTCXO_VC: C0621.1 R0621.2 U0711.1
VIN_PWR: D1111.A X1361.7